# Altium PCB uku20710_com.PcbDoc (part 2 of 4)
Units mm, origin at the board's own origin, x right, y up, seen from the top; angles counter-clockwise.
Board outline 354.7 x 156.7 mm, 2 copper layers (Top Layer, Bottom Layer); 275 components, 514 nets, 980 pads, 578 vias.
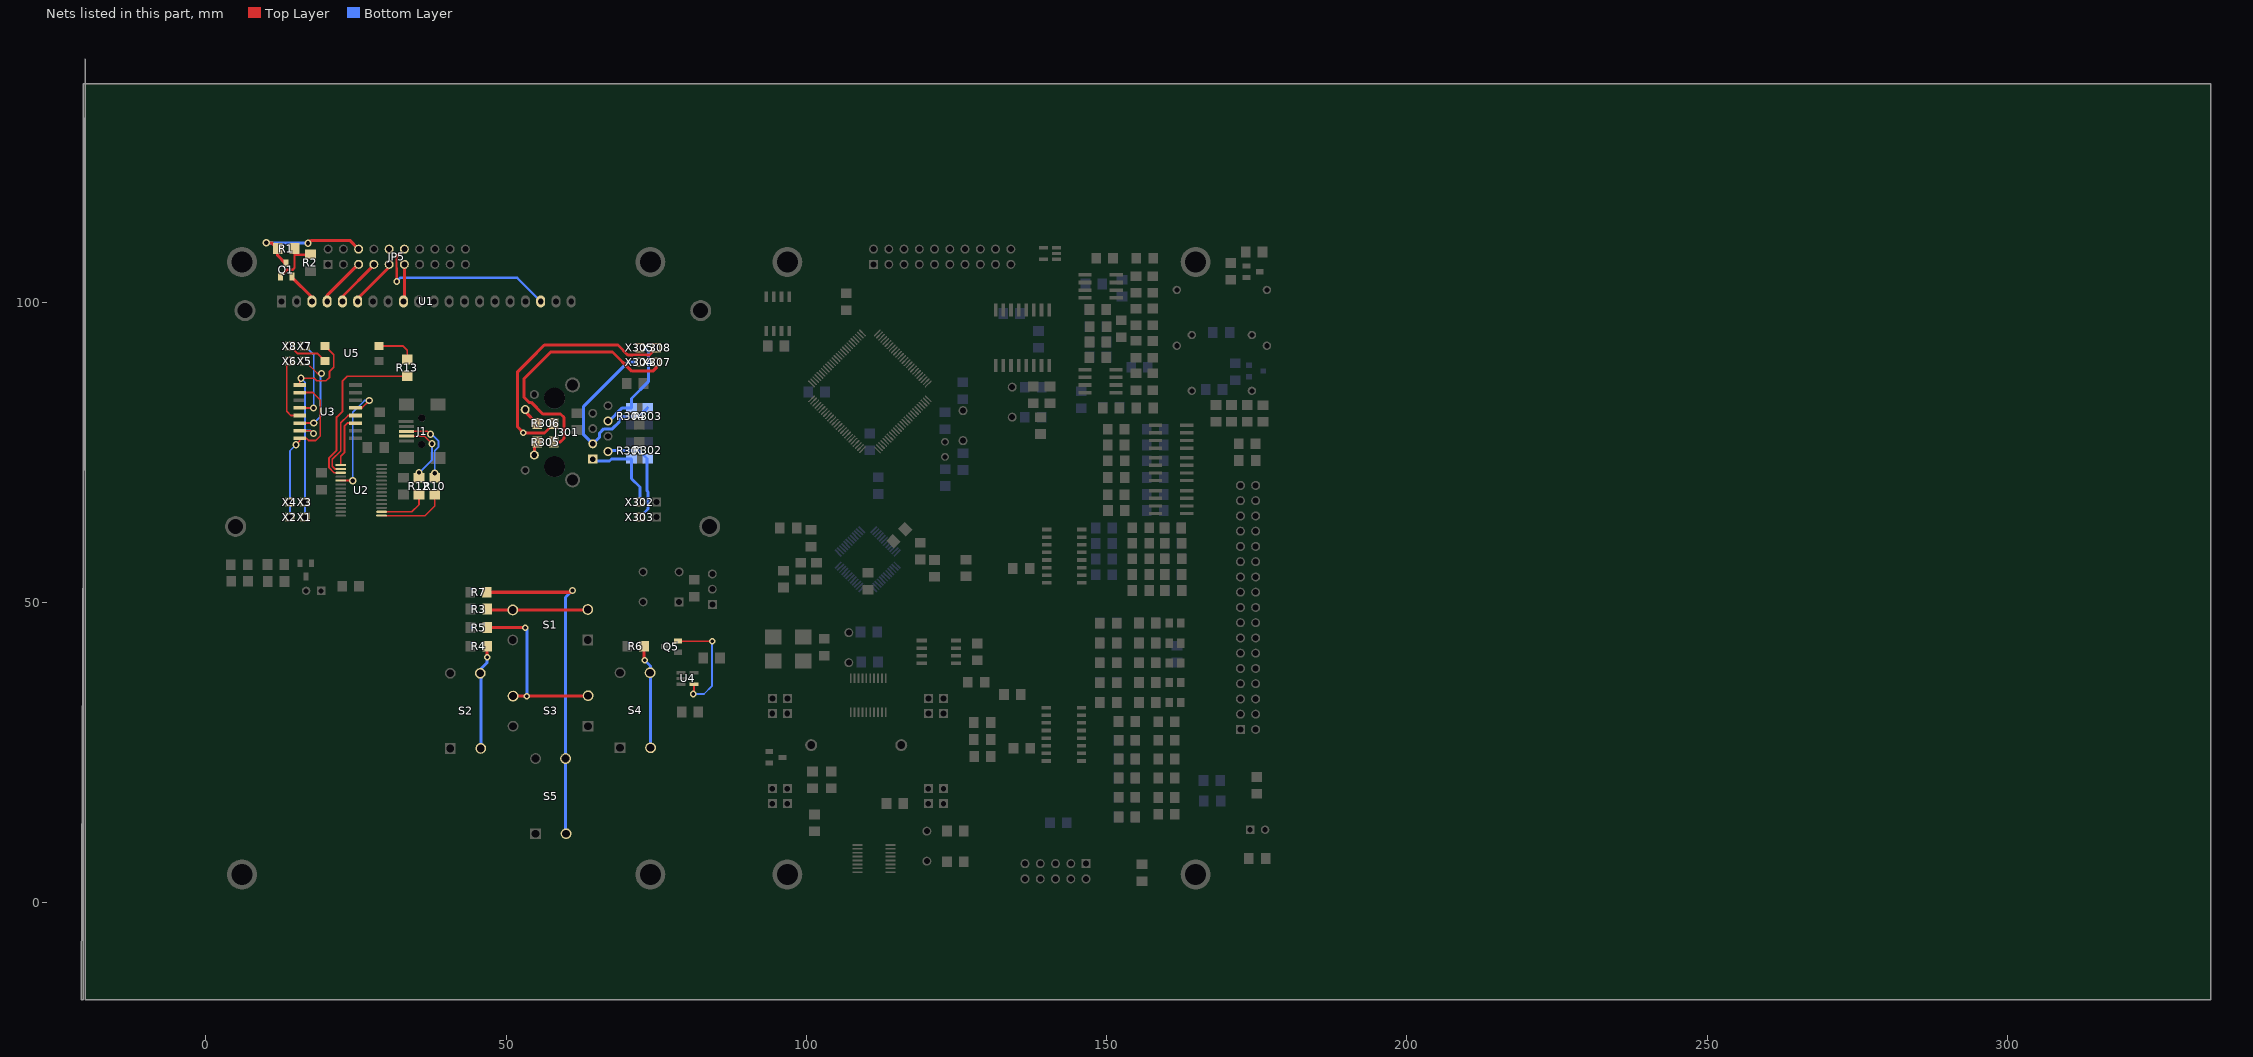
[diagram p2: the nets of this part, all layers, seen from the top]

## Via types
v1: diameter 1.1, hole 0.6, Top Layer to Bottom Layer, 491 vias
v2: diameter 1.2, hole 0.7, Top Layer to Bottom Layer, 63 vias
v3: diameter 1.5, hole 1, Top Layer to Bottom Layer, 20 vias
v4: diameter 1.27, hole 0.7, Top Layer to Bottom Layer, 3 vias
v5: diameter 1.2, hole 0.6, Top Layer to Bottom Layer, 1 vias

## Nets (pads, with @x,y where several pads share a name; then routed paths per layer and width w, separated by ;. In a path a pad name is that pad's centre, name@x,y a point inside that pad or via, vN(x,y) a via of type N, cw(c..) or ccw(c..) an arc to the next point about the centre after c; other vN are vias at no path point) (continued)
NetFU500_1: 
NetFU700_1: 
NetFU700_2: 
NetJ1_2: J1.2 R12.1 | length 11.4
  Top Layer w0.25: J1.2@33.308,77.72 36.359,77.72 v2(37.659,76.419)
  Top Layer w0.3: R12.1@35.502,70.78 35.509,70.786 v2(35.509,71.618)
  Bottom Layer w0.3: v2(35.509,71.618) 37.659,73.769 v2(37.659,76.419)
NetJ1_3: J1.3 R10.1 | length 12.5
  Top Layer w0.25: J1.3@33.308,78.52 36.909,78.52 v2(37.409,78.02)
  Top Layer w0.3: R10.1@38.103,70.78 38.103,71.511 v2(38.11,71.518)
  Bottom Layer w0.3: v2(37.409,78.02) 37.609,78.02 38.71,76.919 38.71,75.869 38.11,75.269 v2(38.11,71.518)
NetJ301_1: J301.1 R301.1 X302.1 | length 14.5
  Bottom Layer w0.5: J301.1@64.419,73.871 64.722,73.569 67.217,73.569 67.552,73.904 R301.1@70.863,73.904 70.863,70.623 72.269,69.217 X302.1@72.269,66.716 ; 67.817,73.869 67.819,73.866
NetJ301_2: J301.2 R302.2 X303.1 | length 17.5
  Bottom Layer w0.5: J301.2@66.969,75.141 67.147,75.319 72.118,75.319 73.469,73.969 73.469,73.928 73.469,68.567 73.619,68.417 73.619,65.566 X303.1@72.269,64.216
NetJ301_3: J301.3 R303.1 X304.1 | length 31.5
  Bottom Layer w0.5: X304.1@72.269,90.016 70.261,90.016 62.916,82.671 62.916,77.914 J301.3@64.419,76.411 65.567,77.558 65.567,78.22 66.267,78.92 67.667,78.92 68.817,80.07 68.817,80.37 69.417,80.97 72.118,80.97 R303.1@73.576,82.428
NetJ301_6: J301.6 R304.2 X305.1 | length 17
  Bottom Layer w0.5: J301.6@66.969,80.221 67.168,80.221 69.35,82.404 R304.2@70.863,82.404 70.863,83.966 73.669,86.772 73.669,91.773 73.026,92.416 X305.1@72.269,92.416
NetJ301_10: J301.10 R305.1 | length 2.4
  Top Layer w0.5: J301.10@54.689,74.546 54.689,76.242 R305.1@55.157,76.709
NetJ301_11: J301.11 R306.1 | length 3.1
  Top Layer w0.5: J301.11@53.169,82.116 53.169,81.765 R306.1@55.114,79.82
NetJP3_3: 
NetJP3_3: 
NetJP5_5: JP5.5 U1.4 | length 8.4
  Top Layer w0.5: U1.4@20.193,100.131 20.193,101.143 25.35,106.3 JP5.5@25.43,106.3
NetJP5_6: JP5.6 Q1.3 R1.1 | length 25.4
  Top Layer w0.5: v2(10.053,109.9) 10.981,109.9 R1.1@11.953,108.927 ; R1.1@11.953,108.777 11.953,107.777 13.233,106.498 Q1.3@13.355,106.498 ; v2(16.997,109.828) 17.47,110.3 23.97,110.3 JP5.6@25.43,108.84
  Bottom Layer w0.3: 13.081,109.828 v2(16.997,109.828)
  Bottom Layer w0.5: v2(10.053,109.9) 16.925,109.9 v2(16.997,109.828)
NetJP5_7: JP5.7 U1.5 | length 8.3
  Top Layer w0.5: U1.5@22.733,100.131 22.733,100.933 27.97,106.17 JP5.7@27.97,106.3
NetJP5_9: JP5.9 U1.6 | length 8.3
  Top Layer w0.5: U1.6@25.273,100.131 25.273,100.623 30.51,105.86 JP5.9@30.51,106.3
NetJP5_10: JP5.10
NetJP5_11: JP5.11 U1.9 | length 6.2
  Top Layer w0.5: U1.9@32.893,100.131 33.05,100.288 JP5.11@33.05,106.3
NetJP5_12: JP5.12 U1.18 | length 31.8
  Top Layer w0.3: 31.75,105.677 31.75,107.027
  Top Layer w0.4: v1(31.75,103.45) 31.75,105.677 ; 31.75,107.027 31.75,107.54 JP5.12@33.05,108.84
  Bottom Layer w0.4: v1(31.75,103.45) 32.35,104.05 51.834,104.05 U1.18@55.753,100.131
NetJP11_1: 
NetQ1_1: Q1.1 R1.2 R2.1 | length 8.8
  Top Layer w0.4: Q1.1@12.405,104.298 13.484,105.377 14.404,105.377 14.754,105.727 R1.2@14.754,108.877 ; 14.754,107.877 17.204,107.877 R2.1@17.354,108.027
NetQ1_2: Q1.2 U1.3 | length 6.1
  Top Layer w0.5: Q1.2@14.304,104.176 17.653,100.827 U1.3@17.653,100.131 U1.3@17.653,100.847
NetQ2_1: 
NetQ2_3: 
NetQ4_1: 
NetQ5_2: Q5.2 U4.4 | length 18.6
  Top Layer w0.3: Q5.2@78.6,43.65 78.626,43.625 78.7,43.55 v1(84.3,43.55) ; v1(81.15,34.75) 81.275,34.875 U4.4@81.275,36.4
  Bottom Layer w0.3: v1(81.15,34.75) 82.95,34.75 84.3,36.1 v1(84.3,43.55)
NetQ6_1: 
NetQ7_2: 
NetQ7_4: 
NetQ8_2: 
NetQ8_4: 
NetQ9_2: 
NetQ9_4: 
NetQ10_1: 
NetQ10_3: 
NetQ10_3: 
NetQ11_1: 
NetQ11_1: 
NetQ11_3: 
NetQ500_1: 
NetQ501_1: 
NetQ700_1: 
NetQ700_3: 
NetR3_1: R3.1 S1.2 | length 16.8
  Top Layer w0.5: R3.1@46.863,48.907 47.019,48.75 S1.2@51.1,48.75 63.52,48.75 S1.2@63.6,48.83
NetR3_2: 
NetR3_2: 
NetR3_2: 
NetR3_2: 
NetR3_2: 
NetR3_2: 
NetR3_2: 
NetR4_1: R4.1 S2.2 | length 17.5
  Top Layer w0.5: S2.2@45.7,38.2 S2.2@45.78,38.12 ; v1(46.85,40.85) R4.1@46.85,42.65
  Bottom Layer w0.5: S2.2@45.78,25.7 45.78,38.2 45.78,38.93 46.85,40 v1(46.85,40.85)
NetR4_2: 
NetR5_1: R5.1 S3.2 | length 30.3
  Top Layer w0.5: R5.1@46.863,45.807 53.144,45.807 v1(53.15,45.8) ; S3.2@51.15,34.4 v1(53.45,34.4) 63.57,34.4 S3.2@63.65,34.48
  Bottom Layer w0.5: v1(53.15,45.8) 53.45,45.5 v1(53.45,34.4)
NetR5_2: 
NetR6_1: R6.1 S4.2 | length 17.4
  Top Layer w0.5: R6.1@72.95,42.75 72.95,42.707 72.95,40.5 v1(73.05,40.4)
  Bottom Layer w0.5: v1(73.05,40.4) 74.05,39.4 74.05,38.3 S4.2@74.05,25.8
NetR6_2: 
NetR7_1: R7.1 S5.2 | length 55.4
  Top Layer w0.6: R7.1@46.8,51.7 60.75,51.7 v1(61.05,52)
  Bottom Layer w0.5: S5.2@59.98,11.5 59.9,11.58 S5.2@59.9,24 59.9,50.85 v1(61.05,52)
NetR7_2: 
NetR7_2: 
NetR8_1: 
NetR8_1: 
NetR8_2: 
NetR8_2: 
NetR10_2: R10.2 U2.15 | length 11.4
  Top Layer w0.3: U2.15@29.261,64.448 36.491,64.448 38.11,66.067 R10.2@38.11,67.967
NetR12_2: R12.2 U2.16 | length 8.4
  Top Layer w0.3: U2.16@29.261,65.098 34.291,65.098 35.509,66.317 R12.2@35.509,67.917
NetR13_1: R13.1 U2.3 | length 28.8
  Top Layer w0.3: U2.3@22.461,71.598 21.325,71.598 20.505,72.418 20.505,74.069 21.755,75.319 21.755,80.87 22.756,81.871 22.756,86.922 23.506,87.672 33.508,87.672 R13.1@33.508,87.722
NetR13_2: R13.2 U5.2 | length 6.6
  Top Layer w0.3: U5.2@28.807,92.723 32.809,92.723 33.515,92.017 R13.2@33.515,90.46
NetR14_2: 
NetR20_1: 
NetR22_2: 
NetR22_2: 
NetR22_2: 
NetR22_2: 
NetR22_2: 
NetR22_2: 
NetR22_2: 
NetR22_2: 
NetR22_2: 
NetR25_1: 
NetR30_2: 
NetR38_1: 
NetR42_1: 
NetR42_2: 
NetR43_1: 
NetR43_2: 
NetR43_2: 
NetR44_1: 
NetR44_2: 
NetR44_2: 
NetR45_2: 
NetR49_1: 
NetR49_2: 
NetR51_1: 
NetR51_2: 
NetR52_1: 
NetR53_1: 
NetR57_1: 
NetR60_1: 
NetR69_2: 
NetR83_1: 
NetR86_1: 
NetR95_1: 
NetR96_2: 
NetR112_1: 
NetR113_1: 
NetR114_1: 
NetR115_1: 
NetR116_1: 
NetR117_2: 
NetR120_1: 
NetR305_2: R305.2 X307.1 | length 42.9
  Top Layer w0.5: R305.2@58.015,76.719 59.015,76.719 59.615,77.319 59.615,80.82 59.065,81.371 56.114,81.371 54.164,83.321 53.814,83.321 52.963,84.171 52.963,87.272 57.414,91.723 67.717,91.723 70.918,88.522 74.419,88.522 75.069,89.172 X307.1@75.069,90.016
NetR306_2: R306.2 X308.1 | length 42.5
  Top Layer w0.4: 71.018,91.223 73.469,91.223
  Top Layer w0.5: R306.2@57.957,79.809 56.367,78.22 52.863,78.22 v1(52.863,78.27) 51.913,79.22 51.913,88.422 53.914,90.423 56.364,92.873 68.617,92.873 70.268,91.223 71.018,91.223 ; 73.469,91.223 73.876,91.223 X308.1@75.069,92.416
NetR504_1: 
NetR505_2: 
NetR505_2: 
NetR510_1: 
NetR702_2: 
NetR704_2: 
NetR705_1: 
NetS2_1: 
NetU1_1: 
NetU1_4: 
NetU1_5: 
NetU2_1: U2.1 U3.3 | length 8.7
  Top Layer w0.3: U2.1@22.461,72.899 22.461,74.324 23.056,74.919 23.056,79.37 23.551,79.866 U3.3@24.88,79.866
NetU2_2: U2.2 U3.4 | length 12.3
  Top Layer w0.3: U2.2@22.461,72.248 21.475,72.248 21.055,72.668 21.055,73.819 22.456,75.219 22.456,79.92 23.671,81.136 U3.4@24.88,81.136
NetU2_5: U2.5 U3.5 | length 19.7
  Top Layer w0.3: U2.5@22.461,70.298 24.337,70.298 v2@24.356,70.318 ; U3.5@24.88,82.406 25.991,82.406 v2(27.207,83.621)
  Bottom Layer w0.3: v2(24.456,70.268) 24.456,81.671 26.407,83.621 v2(27.207,83.621)
NetU3_9: U3.9 U3.15 U5.3 X1.1 X3.1 | length 39.9
  Top Layer w0.3: U3.15@15.63,78.596 17.429,78.596 v2(17.905,78.12) ; U3.9@15.63,86.216 15.63,87.098 v2(15.854,87.322) 18.055,87.322 18.455,86.922 20.005,86.922 20.605,87.522 20.605,88.472 21.305,89.172 21.305,91.225 U5.3@19.807,92.723
  Bottom Layer w0.3: v2(15.854,87.322) 16.5,86.676 X1.1@16.5,64.2 ; 16.504,78.62 17.404,78.62 v2(17.905,78.12)
NetU3_10: U3.10 U3.16 X2.1 X4.1 | length 27.6
  Top Layer w0.3: v2(15.004,76.269) 15.63,76.896 U3.16@15.63,77.326 16.748,77.326 17.104,76.969 18.305,76.969 19.055,77.72 19.055,83.721 17.83,84.946 U3.10@15.63,84.946
  Bottom Layer w0.3: X2.1@14,64.2 14,75.266 v2(15.004,76.269)
NetU3_12: U3.12 X7.1 | length 13.2
  Top Layer w0.3: U3.12@15.654,82.371 v2(17.905,82.371)
  Bottom Layer w0.3: X7.1@16.5,92.7 17.955,91.246 17.955,82.421 v2(17.905,82.371)
NetU3_13: U3.13 X6.1 | length 11.1
  Top Layer w0.3: X6.1@14,90.2 13.453,89.653 13.453,81.821 14.138,81.136 U3.13@15.63,81.136
NetU3_14: U3.14 X5.1 | length 14.7
  Top Layer w0.3: U3.14@15.63,79.866 15.635,79.87 v2(17.955,79.87) ; X5.1@16.5,90.2 18.578,88.122 v2(19.255,88.122)
  Bottom Layer w0.3: v2(17.955,79.87) 19.105,81.02 19.105,87.972 v2(19.255,88.122)
NetU5_1: 
NetU5_4: U5.4 X8.1 | length 6.8
  Top Layer w0.3: X8.1@14,92.7 15.227,91.473 18.557,91.473 U5.4@19.807,90.223
NetU8_3: 
NetU8_7: 
NetU8_8: 
NetU11_5: 
NetU14_3: 
NetU14_4: 
NetU14_5: 
NetU14_6: 
NetU14_12: 
NetU14_13: 
NetU14_14: 
NetU15_3: 
NetU15_3: 
NetU15_3: 
NetU15_3: 
NetU15_5: 
NetU15_5: 
NetU15_5: 
NetU15_5: 
NetU15_5: 
NetU15_5: 
NetU15_7: 
NetU15_7: 
NetU15_9: 
NetU15_10: 
NetU15_15: 
NetU16_3: 
NetU16_4: 
NetU16_6: 
NetU19_4: 
NetU21_1: 
NetU21_2: 
NetU503_4: 
NetU700_4: 
NetX13_1: 
NetX15_1: 
NetX23_1: 
NetX32_1: 
NetX33_1: 
OFF1: 
OFF2: 
P0_0: 
P0_1: 
P0_2: 
P0_2: 
P0_2: 
P0_2: 
P0_2: 
P0_2: 
P0_3: 
P0_3: 
P0_3: 
P0_3: 
P0_3: 
P0_3: 
P0_3: 
P0_4: 
P0_5: 
P0_6: 
P0_7: 
P0_8: 
P0_8: 
P0_8: 
P0_8: 
P0_8: 
P0_8: 
P0_8: 
P0_8: 
P0_8: 
P0_8: 
P0_8: 
P0_8: 
P0_8: 
P0_8_: 
P0_8_: 
P0_8_: 
P0_9: 
P0_9: 
P0_9: 
P0_9_: 
P0_9_: 
P0_9_: 
P0_9_: 
P0_10: 
P0_11: 
P0_13: 
P0_15: 
P0_16: 
P0_17: 
P0_18: 
P0_19: 
P0_19: 
P0_20: 
P0_21: 
P0_23: 
P0_24: 
P0_25: 
P0_25: 
P0_25: 
P0_25: 
P0_25: 
P0_25: 
P0_25: 
P0_25: 
P0_25: 
P0_25: 
P0_25: 
P0_27: 
P0_27: 
P0_27: 
P0_27: 
P0_27: 
P0_27: 
P0_27: 
P0_27: 
P0_27: 
P0_27: 
P0_27: 
P0_27: 
P0_27: 
P0_28: 
P0_29: 
P0_30: 
P1_0: 
P1_1: 
P1_4: 
P1_8: 
P1_9: 
P1_10: 
P1_14: 
P1_15: 
P1_16: 
P1_17: 
P1_18: 
P1_19: 
P1_20: 
P1_21: 
P1_21: 
P1_22: 
P1_22: 
P1_22: 
P1_22: 
P1_22: 
P1_22: 
P1_22: 
P1_22: 
P1_23: 
P1_24: 
P1_25: 
P1_25: 
P1_25: 
P1_25: 
P1_25: 
P1_25: 
P1_26: 
P1_27: 
P1_28: 
P1_29: 
P1_29: 
P1_29: 
P1_29: 
P1_29: 
P1_30: 
P1_31: 
P1_31: 
P1_31: 
P1_31: 
P1_31: 
P1_31: 
P1_31: 
P1_31: 
P1_31: 
P1_31: 
P1_31: 
P1_31: 
P1_31: 
P1_31: 
P2_0: 
P2_1: 
P2_7: 
P2_8: 
P2_9: 
P2_10: 
P2_13: 
P3_25: 
P3_26: 
PB1: 
PB1: 
PB2: 
PB2: 
PB3: 
PB3: 
PE6: 
PE6: 
PE7: 
PQ3: 
PQ4: 
PQ5: 
PQ6: 
PROG0: 
PROG1: 
PROG1: 
PROG1: 
PWM: 
PWM1: 
PWM2: 
REL1: 
REL1: 
REL2: 
REL3: 
REL4: 
REL5: 
REL6: 
RES: 
RX: 
RXCAN: 
SK1: 
SK2: 
SK3: 
SK4: 
T3: 
T3: 
TD1: 
TX: 
U2: 
U5: 
U6: 
U7: 
U8: 
UAKB: 
UB1: 
UB2: 
UBM1: 
UBM2: 
UIB1: 
UIB2: 
ULOAD: 
US: 
US1: 
US1: 
US1: 
US1: 
US1: 
US1: 
US1: 
US1: 
US1: 
UU1: 
UU2: 
UU3: 
UU4: 
UU5: 
UU6: 
UU7: 
UU8: 
UU9: 
UU10: 
UU11: 
UU12: 
UU13: 
UU14: 
VBAT: 
VREF: 
VS: 
VS: 
pads on no net: A1.1 A1.2 C1_1.1 C1_1.2 C2_1.1 C2_1.2 C3_1.1 C3_1.2 C4_1.1 C4_1.2 C5_1.1 C5_1.2 C6.1 C6.2 C7.1 C7.2 C8.1 C8.2 C9.1 C9.2 C10.1 C10.2 C11.1 C11.2 C12.1 C12.2 C13.1 C13.2 C14.1 C14.2 C15.1 C15.2 C16.1 C16.2 C17.1 C17.2 C18.1 C18.2 C19.1 C19.2 C20.1 C20.2 C21.1 C21.2 C22_1.1 C22_1.2 C23.1 C23.2 C24.1 C24.2 C25.1 C25.2 C26.1 C26.2 C28.1 C28.2 C30.1 C30.2 C31.1 C31.2 C32.1 C32.2 C33.1 C33.2 C34.1 C34.2 C35.1 C35.2 C36.1 C36.2 C37.1 C37.2 C38.1 C38.2 C39.1 C39.2 C40.1 C40.2 C50.1 C50.2 C51.1 C51.2 C52.1 C52.2 C53.1 C53.2 C54.1 C54.2 C55.1 C55.2 C56.1 C56.2 C57.1 C57.2 C58.1 C58.2 C60.1 C60.2 C61.1 C61.2 C62.1 C62.2 C63.1 C63.2 C64.1 C64.2 C65.1 C65.2 C66.1 C66.2 C200.1 C200.2 C201.1 C201.2 D1_1.1 D1_1.2 D3_1.1 D3_1.2 D4.1 D4.2 D5.1 D5.2 D6.1 D6.2 D7.1 D7.2 D8.1 D8.2 D9.1 D9.2 D10.1 D10.2 D11.1 D11.2 D12.1 D12.2 D13.1 D13.2 J1.0 J1.4 J1.6@33.381,74.05 J1.6@33.381,82.95 J1.6@38.653,74.05 J301.0 J301.7 JP1.1 JP1.2 JP1.3 JP1.4 JP1.5 JP1.6 JP1.7 JP1.8 JP1.9 JP1.10 JP4.1 JP4.2 JP4.3 JP4.4 JP4.5 JP4.6 JP4.7 JP4.8 JP4.9 JP4.10 JP4.11 JP4.12 JP4.13 JP4.14 JP4.15 JP4.16 JP4.17 JP4.18 JP4.19 JP4.20 JP4.21 JP4.22 JP4.23 JP4.24 JP4.25 JP4.26 JP4.27 JP4.28 JP4.29 JP4.30 JP4.31 JP4.32 JP4.33 JP4.34 JP6.1 JP6.2 JP6.3 JP6.4 JP6.5 JP6.6 JP6.7 JP6.8 JP6.9 JP6.10 JP6.11 JP6.12 JP6.13 JP6.14 JP6.15 JP6.16 JP6.17 JP6.18 JP6.19 JP6.20 K1.1 K1.3 K1.4 K1.5 K2.1 K2.3 K2.4 K2.5 Q1_1.1 Q1_1.2 Q1_1.3 Q4.1 Q4.2 Q4.3 Q6.1 Q6.2 Q6.3 Q7.1 Q7.2 Q7.3 Q7.4 Q7.5 Q7.6 Q7.7 Q7.8 Q8.1 Q8.2 Q8.3 Q8.4 Q8.5 Q8.6 Q8.7 Q8.8 Q9.1 Q9.2 Q9.3 Q9.4 Q9.5 Q9.6 Q9.7 Q9.8 R1_1.1 R1_1.2 R2_1.1 R2_1.2 R3_1.1 R3_1.2 R9_1.1 R9_1.2 R10_1.1 R10_1.2 R12_1.1 R12_1.2 R13_1.1 R13_1.2 R16.1 R16.2 R17.1 R17.2 R18.1 R18.2 R19.1 R19.2 R20.1 R20.2 R22.1 R22.2 R23.1 R23.2 R24.1 R24.2 R25.1 R25.2 R26.1 R26.2 R27.1 R27.2 R28.1 R28.2 R29.1 R29.2 R30.1 R30.2 R31.1 R31.2 R32.1 R32.2 R33.1 R33.2 R34.1 R34.2 R35.1 R35.2 R36.1 R36.2 R37.1 R37.2 R38.1 R38.2 R39.1 R39.2 R40.1 R40.2 R41.1 R41.2 R43.1 R43.2 R45.1 R45.2 R46.1 R46.2 R47.1 R47.2 R48.1 R48.2 R49.1 R49.2 R51.1 R51.2 R53.1 R53.2 R54.1 R54.2 R55.1 R55.2 R56.1 R56.2 R57.1 R57.2 R58.1 R58.2 R59.1 R59.2 R60.1 R60.2 R61.1 R61.2 R62.1 R62.2 R63.1 R63.2 R64.1 R64.2 R65.1 R65.2 R66.1 R66.2 R67.1 R67.2 R68.1 R68.2 R69.1 R69.2 R70.1 R70.2 R71.1 R71.2 R72.1 R72.2 R73.1 R73.2 R74.1 R74.2 R75.1 R75.2 R76.1 R76.2 R77.1 R77.2 R78.1 R78.2 R79.1 R79.2 R80.1 R80.2 R81.1 R81.2 R82.1 R82.2 R84.1 R84.2 R92.1 R92.2 R95.1 R95.2 R96.1 R96.2 R97.1 R97.2 R98.1 R98.2 R99.1 R99.2 R111.1 R111.2 R112.1 R112.2 R113.1 R113.2 R114.1 R114.2 R115.1 R115.2 R116.1 R116.2 R117.1 R117.2 R118.1 R118.2 R120.1 R120.2 R121.1 R121.2 R122.1 R122.2 R123.1 R123.2 R124.1 R124.2 R125.1 R125.2 R126.1 R126.2 R127.1 R127.2 R128.1 R128.2 R129.1 R129.2 U1.7 U1.8 U1_1.1 U1_1.2 U1_1.3 U1_1.4 U1_1.5 U1_1.6 U1_1.7 U1_1.8 U1_1.9 U1_1.10 U1_1.11 U1_1.12 U1_1.13 U1_1.14 U1_1.15 U1_1.16 U2.6 U2.8 U2.9 U2.10 U2.11 U2.12 U2.13 U2.14 U2.19 U2.22 U2.23 U2.24 U2.27 U2.28 U2_1.1 U2_1.2 U2_1.3 U2_1.4 U2_1.5 U2_1.6 U2_1.7 U2_1.8 U3.6 U3.11 U3_1.1 U3_1.2 U3_1.3 U3_1.4 U3_1.5 U3_1.6 U3_1.7 U3_1.8 U3_1.9 U3_1.10 U3_1.11 U3_1.12 U3_1.13 U3_1.14 U3_1.15 U3_1.16 U3_1.17 U3_1.18 U3_1.19 U3_1.20 U3_1.21 U3_1.22 U3_1.23 U3_1.24 U3_1.25 U3_1.26 U3_1.27 U3_1.28 U3_1.29 U3_1.30 U3_1.31 U3_1.32 U3_1.33 U3_1.34 U3_1.35 U3_1.36 U3_1.37 U3_1.38 U3_1.39 U3_1.40 U3_1.41 U3_1.42 U3_1.43 U3_1.44 U3_1.45 U3_1.46 U3_1.47 U3_1.48 U4.3 U4_1.1 U4_1.2 U4_1.3 U4_1.4 U4_1.5 U4_1.6 U4_1.7 U4_1.8 U4_1.9 U4_1.10 U4_1.11 U4_1.12 U4_1.13 U4_1.14 U4_1.15 U4_1.16 U4_1.17 U4_1.18 U4_1.19 U4_1.20 U5_1.1 U5_1.2 U5_1.3 U5_1.4 U5_1.5 U6.1 U6.2 U6.3 U6.4 U6.5 U6.6 U6.7 U6.8 U6.9 U6.10 U6.11 U6.12 U6.13 U6.14 U6.15 U6.16 U9.1 U9.2 U9.3 U9.4 U9.5 U9.6 U9.7 U9.8 U10.1 U10.2 U10.3 U10.4 U10.5 U10.6 U10.7 U10.8 U10.9 U10.10 U10.11 U10.12 U10.13 U10.14 U10.15 U10.16 U11.1 U11.2 U11.3 U11.4 U11.5 U11.6 U11.7 U11.8 U12.1 U12.2 U12.3 U12.4 U13.1 U13.2 U13.3 U13.4 U13.5 U13.6 U13.7 U13.8 U13.9 U13.10 U13.11 U13.12 U13.13 U13.14 U13.15 U13.16 U13.17 U13.18 U13.19 U13.20 U13.21 U13.22 U13.23 U13.24 U13.25 U13.26 U13.27 U13.28 U13.29 U13.30 U13.31 U13.32 U13.33 U13.34 U13.35 U13.36 U13.37 U13.38 U13.39 U13.40 U13.41 U13.42 U13.43 U13.44 U13.45 U13.46 U13.47 U13.48 U13.49 U13.50 U13.51 U13.52 U13.53 U13.54 U13.55 U13.56 U13.57 U13.58 U13.59 U13.60 U13.61 U13.62 U13.63 U13.64 U13.65 U13.66 U13.67 U13.68 U13.69 U13.70 U13.71 U13.72 U13.73 U13.74 U13.75 U13.76 U13.77 U13.78 U13.79 U13.80 U13.81 U13.82 U13.83 U13.84 U13.85 U13.86 U13.87 U13.88 U13.89 U13.90 U13.91 U13.92 U13.93 U13.94 U13.95 U13.96 U13.97 U13.98 U13.99 U13.100 U23.1 U23.2 U23.3 U23.4 U23.5 U23.6 U23.7 U23.8 U24.1 U24.2 U24.3 U24.4 U24.5 U24.6 U24.7 U24.8 U24.9 U24.10 U24.11 U24.12 U24.13 U24.14 U24.15 U24.16 X1_1.1 X2_1.1 X3_1.1 X4_1.1 X5_1.1 X6_1.1 X7_1.1 X8_1.1 X9.1 X10.1 X11.1 X12.1 X17.1 X18.1 X19.1 X20.1 Y1.1 Y1.2 Y2.1 Y2.2 Y3.1 Y3.2 Y4.1 Y4.2 Y5.1 Y5.2